# Altium PCB PCB1.PcbDoc (part 1 of 2)
Units mil, origin at the board's own origin, x right, y up, seen from the top; angles counter-clockwise.
Board outline 3380 x 2390 mil, 2 copper layers (Top Layer, Bottom Layer); 80 components, 56 nets, 292 pads, 26 vias.
Unrouted connection lines stored in the file: 2.
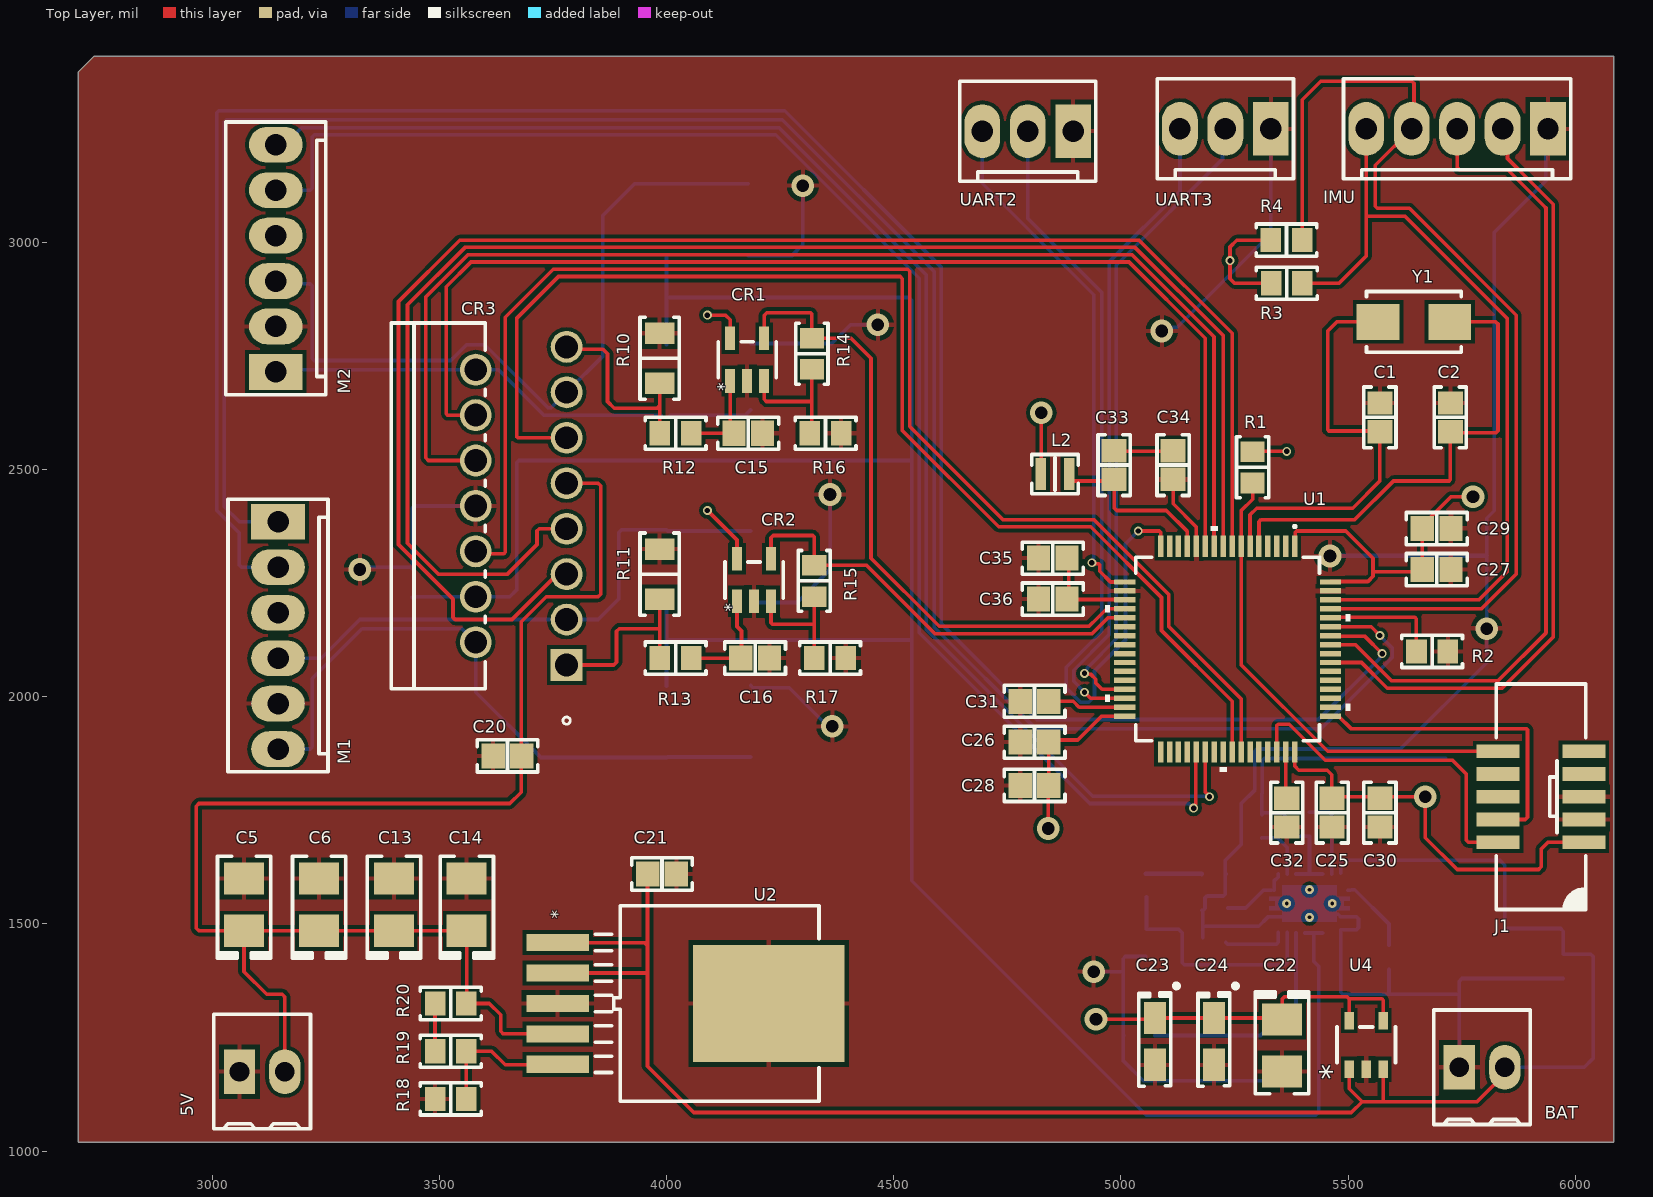
[diagram p0: Top Layer view]
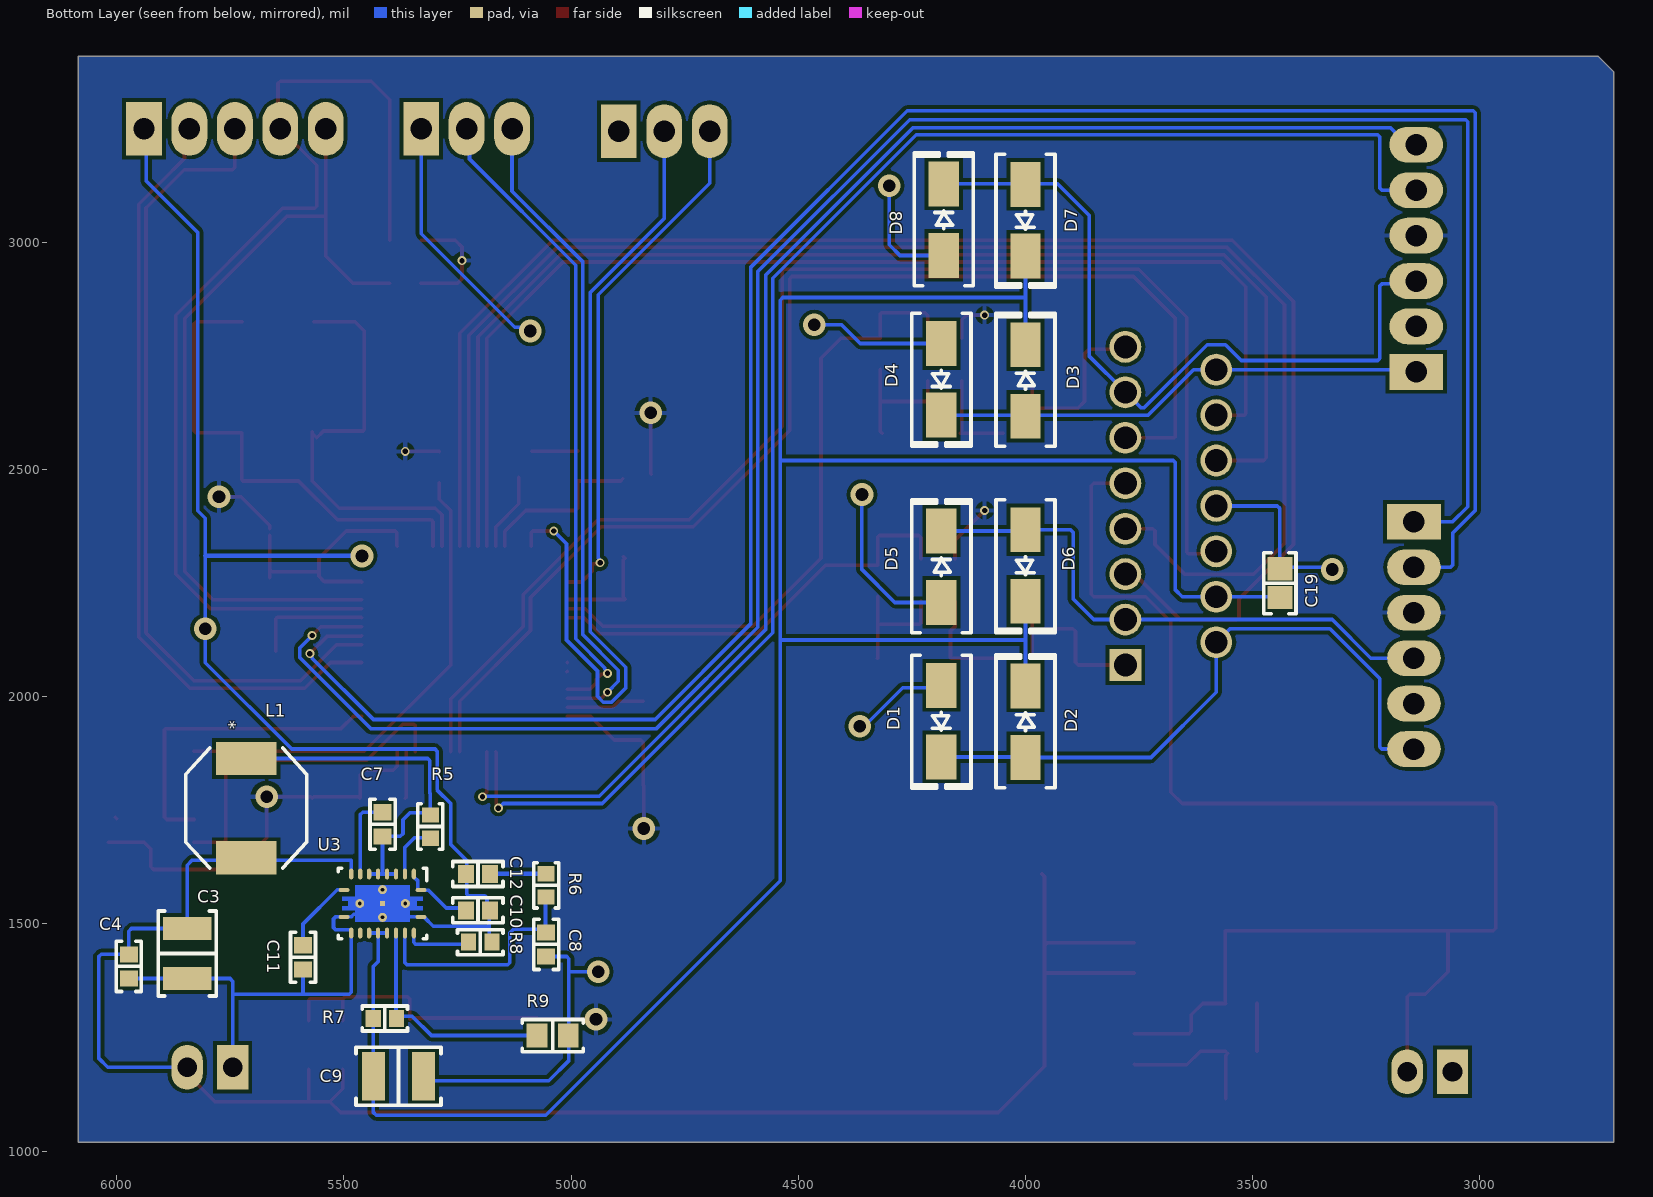
[diagram p1: Bottom Layer view, seen from below]
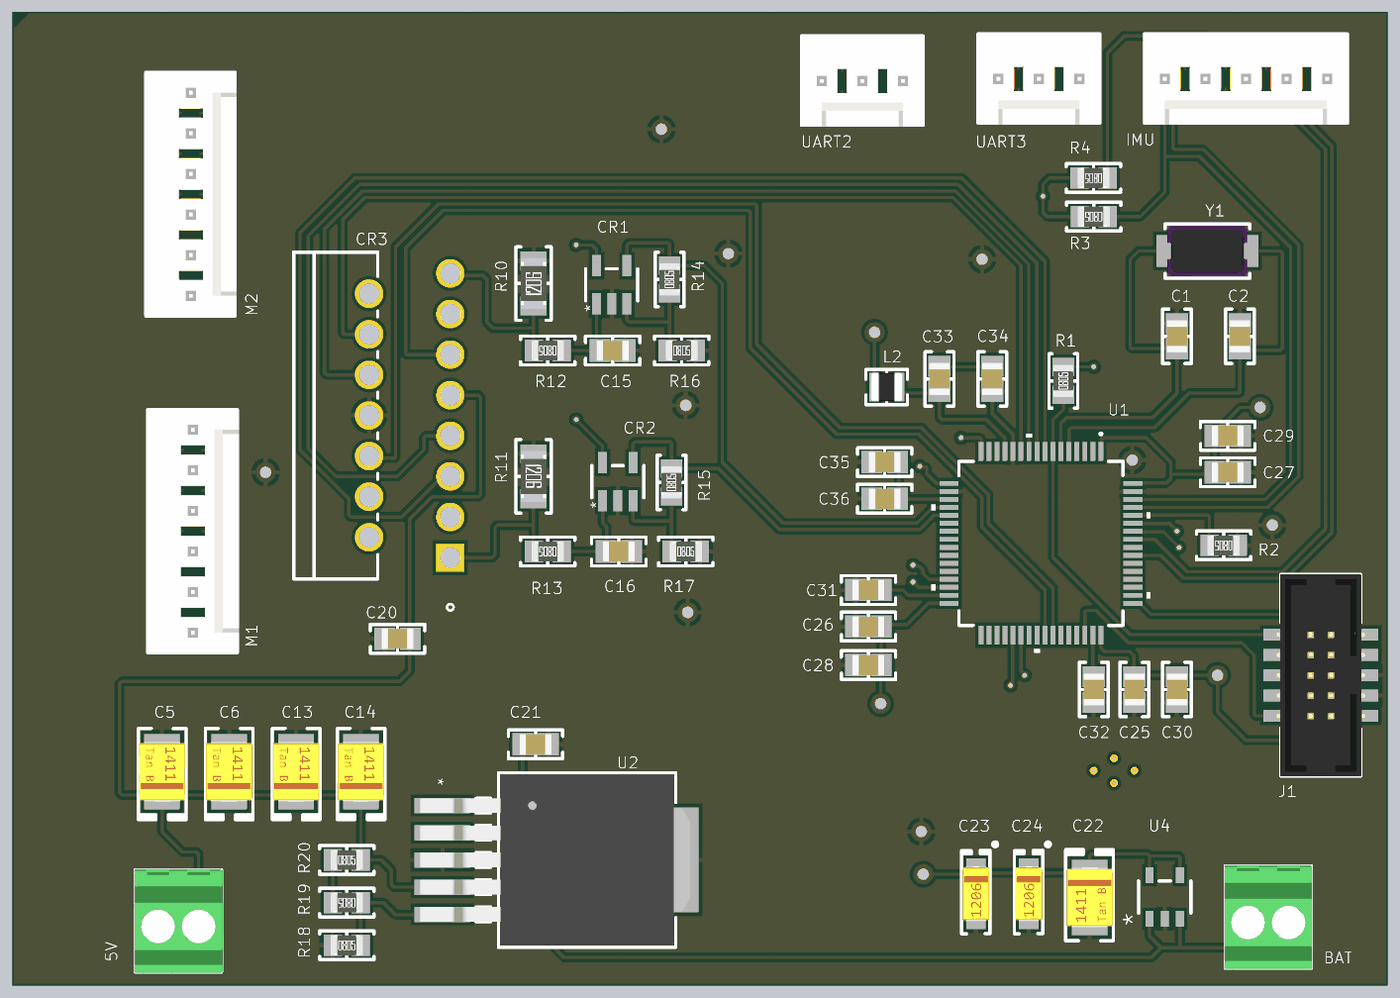
[diagram p2: 3D render of the assembled board from above, using the file's embedded part models]
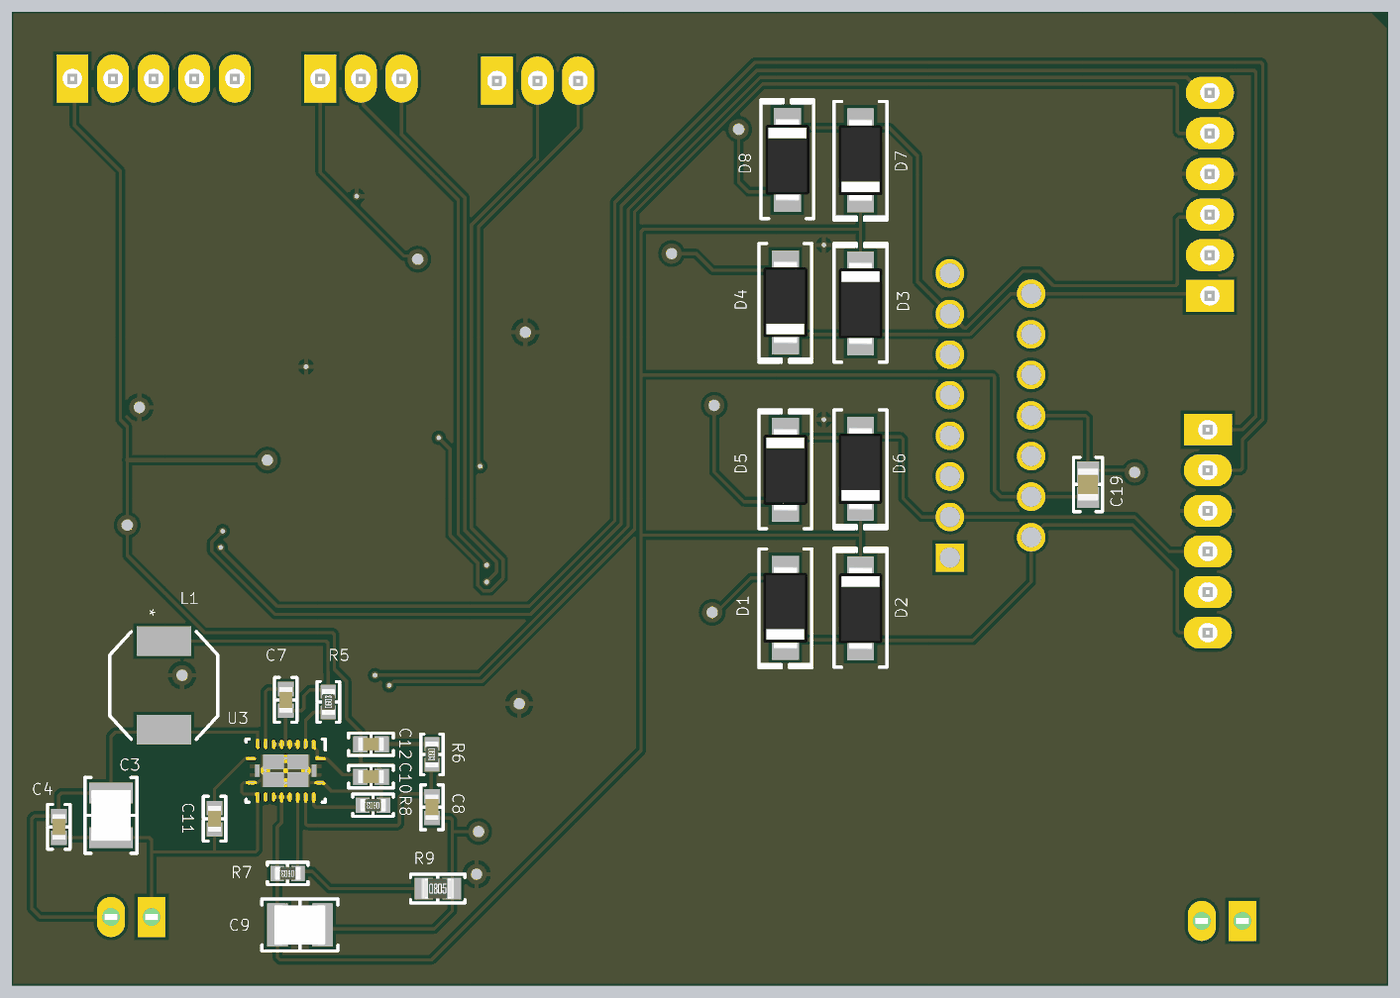
[diagram p3: 3D render of the assembled board from below, using the file's embedded part models]

## Layer stack, top to bottom
Top Solder: solder mask 1, SM-001, Dk 4
Top Layer: signal copper 1.4
Dielectric 1: dielectric 12.6, FR-4, Dk 4.8
Bottom Layer: signal copper 1.4
Bottom Solder: solder mask 1, SM-001, Dk 4

## Board outline
2705,1020 2705,3375 2740,3410 6085,3410 6085,1020

## Design rules (kind name [scope] priority, off if disabled: settings)
Clearance [All] p1: gap=8 ignorepadtopadclearanceinfootprint=TRUE except(0: Arc-Hole Track-Hole SMDPad-Hole THPad-Hole Via-Hole Fill-Hole Poly-Hole Region-Hole Text-Hole; 10: SMDPad-SMDPad)
PolygonConnect [All] p1: connectstyle=Relief reliefconductorwidth=10 reliefentries=4 polygonreliefangle="90 Angle" airgapwidth=10
RoutingVias [All] p1: holewidth=28 width=50 viastyle="Through Hole" minholewidth=28 minwidth=50 maxholewidth=28 maxwidth=50
SolderMaskExpansion [IsVia] p1: expansion=4 istentingtop=TRUE
UnRoutedNet [All] p1: checkbadconnections=TRUE
Width [All] p1: maxlimit=10 minlimit=4.92 preferedwidth=4.92 minimp=50.000000 maximp=50.000000 favimp=50.000000
29 further rules are at their usual default settings.

## Classes and differential pairs
component class Power_5v: C5 C6 C13 C14 C21 C25 C26 C27 C28 C29 C30 C31 C32 C33 C34 L2 R18 R19 R20 U4
component class Power_12v: C3 C4 C7 C8 C9 C10 C11 C12 L1 R5 R6 R7 R8 R9 U3
component class MotorControl: C15 C16 C20 CR1 CR2 D1 D2 D3 D4 D5 D6 D7 D8 M1 R10 R11 R12 R13 R14 R15 R16 R17
component class MCU: 5V BAT C1 C2 IMU J1 R1 R2 R3 R4 UART2

## Components (designator, comment, footprint, x,y, rotation, side; value= is the part's Value field where it differs from the comment)
5V "282834-2" "TE 282834-2" 3110,1175 r180 top (schematic designator J3)
BAT "282834-2" "TE 282834-2" 5795,1184.61 r180 top (schematic designator J2)
C1 "20pF" "CAP 0805_2012" 5570,2615 r270 top
C2 "20pF" "CAP 0805_2012" 5725,2615 r270 top
C3 "10µF" "CAP 1210_3225 - 2.8MM" 5845,1434.88 r270 bottom
C4 "22pF" "CAP 0603_1608" 5973.44,1406.57 r270 bottom
C5 "47µF" "CAP POL 1411_3528" 3070,1542.48 r90 top
C6 "47µF" "CAP POL 1411_3528" 3235,1542.48 r90 top
C7 "0.1µF" "CAP 0603_1608" 5415,1719.39 r270 bottom
C8 "22pF" "CAP 0603_1608" 5055,1455 r90 bottom value=30pF
C9 "22µF" "CAP 1210_3225 - 2.8MM" 5380,1165 r0 bottom
C10 "1µF" "CAP 0603_1608" 5205,1530 r0 bottom
C11 "1µF" "CAP 0603_1608" 5590,1426.57 r90 bottom value=8200pF
C12 "470pF" "CAP 0603_1608" 5205,1610 r180 bottom value=680pF
C13 "47µF" "CAP POL 1411_3528" 3400,1542.48 r90 top
C14 "47µF" "CAP POL 1411_3528" 3560,1542.48 r90 top
C15 "0.1µF" "CAP 0805_2012" 4180,2580 r0 top
C16 "0.1µF" "CAP 0805_2012" 4195,2085 r180 top
C19 "0.1µF" "CAP 0805_2012" 3440,2250 r270 bottom
C20 "0.1µF" "CAP 0805_2012" 3650,1870 r0 top
C21 "10µF" "CAP 0805_2012" 3990,1610 r180 top
C22 "22µF" "CAP POL 1411_3528" 5355,1232.48 r270 top
C23 "2.2µF" "CAP POL 1206_3216" 5075,1241.57 r270 top
C24 "2.2µF" "CAP POL 1206_3216" 5205,1241.57 r270 top
C25 "0.1µF" "CAP 0805_2012" 5465,1745 r90 top
C26 "0.1µF" "CAP 0805_2012" 4810,1900 r0 top
C27 "0.1µF" "CAP 0805_2012" 5695,2280 r180 top
C28 "0.1µF" "CAP 0805_2012" 4810,1805 r0 top
C29 "0.1µF" "CAP 0805_2012" 5695,2370 r180 top
C30 "0.1µF" "CAP 0805_2012" 5570,1745 r90 top
C31 "2.2µF" "CAP 0805_2012" 4810,1990 r0 top
C32 "2.2µF" "CAP 0805_2012" 5365,1745 r90 top
C33 "47µF" "CAP 0805_2012" 4985,2510 r270 top
C34 "47µF" "CAP 0805_2012" 5115,2510 r90 top
C35 "0.1µF" "CAP 0805_2012" 4850,2215 r0 top
C36 "0.1µF" "CAP 0805_2012" 4850,2305 r0 top
CR1 "LMV321ILT" SOT23-5_STM 4177.6,2742 r90 top
CR2 "LMV321ILT" SOT23-5_STM 4192.6,2257 r90 top
CR3 "L298N" Multiwatt15_V_STM 3780,2070 r90 top
D1 "US1G R3G" "DO214AC SMA" 4185,1946.26 r270 bottom
D2 "US1G R3G" "DO214AC SMA" 4000,1945 r90 bottom
D3 "US1G R3G" "DO214AC SMA" 4000,2696.26 r90 bottom
D4 "US1G R3G" "DO214AC SMA" 4185,2698.74 r270 bottom
D5 "US1G R3G" "DO214AC SMA" 4185,2286.26 r90 bottom
D6 "US1G R3G" "DO214AC SMA" 4000,2288.74 r270 bottom
D7 "US1G R3G" "DO214AC SMA" 4000,3048.74 r270 bottom
D8 "US1G R3G" "DO214AC SMA" 4180,3050 r90 bottom
IMU "0022272051" "MOLEX KK 0022272051" 5740,3250 r0 top (schematic designator J5)
J1 "3221-10-0300-00" "CNC TECH 3221-10-0300-00" 5924.49,1780 r180 top
L1 "SPM6530T-2R2M" IND_SPM6530_TDK 5715,1755 r270 bottom
L2 "3.3µH" "IND 0806_2016" 4855,2490 r0 top
M1 "0022272061" "MOLEX KK 0022272061"#1 3145,2135 r90 top (schematic designator J7)
M2 "0022272061" "MOLEX KK 0022272061"#2 3140,2965 r90 top (schematic designator J8)
R1 "10 kOhms" "RES 0805_2012" 5290,2505 r90 top
R2 "10 kOhms" "RES 0805_2012" 5685,2100 r180 top
R3 "4.7 kOhms" "RES 0805_2012" 5365,2910 r180 top
R4 "4.7 kOhms" "RES 0805_2012" 5364.45,3005 r180 top
R5 "267 kOhms" "RES 0603_1608" 5310,1714.39 r90 bottom value="365 kOhms"
R6 "36.5 kOhms" "RES 0603_1608" 5055,1585 r270 bottom value="44.2 kOhms"
R7 "267 kOhms" "RES 0603_1608" 5410,1291.93 r0 bottom value="825 Ohms"
R8 "105 kOhms" "RES 0603_1608" 5200,1460 r0 bottom
R9 "392 kOhms" "RES 0805_2012" 5040.55,1254.39 r180 bottom value="91 kOhms"
R10 "10 mOhms" "RES 1206_3216" 3985,2745 r90 top
R11 "10 mOhms" "RES 1206_3216" 3985,2270 r270 top
R12 "1 kOhms" "RES 0805_2012" 4020,2580 r180 top
R13 "1 kOhms" "RES 0805_2012" 4020,2085 r180 top
R14 "5.6 kOhms" "RES 0805_2012" 4320,2755 r90 top
R15 "5.6 kOhms" "RES 0805_2012" 4325,2255 r90 top
R16 "1 kOhms" "RES 0805_2012" 4350,2580 r0 top
R17 "1 kOhms" "RES 0805_2012" 4360,2085 r0 top
R18 "10 kOhms" "RES 0805_2012" 3525,1115 r0 top
R19 "2 kOhms" "RES 0805_2012" 3525,1220 r180 top
R20 "30 kOhms" "RES 0805_2012" 3525,1325 r0 top
U1 "STM32F405RGT6" LQFP64-10x10mm 5235,2105 r270 top
U2 "MIC29302WU-TR" TO-263-5_MCH 4117,1325 r270 top
U3 "TPS61088RHLR" RHL0020A 5415,1545 r270 bottom value=Value
U4 "MIC5219-3.3YM5-TR" SOT-23-5_M5_MCH 5540,1233.75 r90 top
UART2 "0022272031" "MOLEX KK 0022272031" 4795,3245 r0 top (schematic designator J4)
UART3 "0022272031" "MOLEX KK 0022272031" 5230,3250 r0 top (schematic designator J6)
Y1 "8MHz" "NDK NX5032GA" 5645,2825 r0 top

## Footprints (in the part's own frame and the unit in brackets; to place one, negate y for a bottom-side part, rotate by r counter-clockwise, add the part's x,y. Pads: shape width x height; smd on the part's side, far side on the other; paste and mask are expansions set on the pad)
"CAP 0603_1608" [mm] "Chip Capacitor, 2-Leads, Body 1.60x0.80mm, IPC Medium Density"
  rect 0.9x1 smd: 1(-0.675,0) 2(0.675,0)
  silkscreen extent -1.4,-0.7 1.4,0.7, body extent -0.8,-0.41 0.8,0.41, height 0.82
"CAP 0805_2012" [mm] "Chip Capacitor, 2-Leads, Body 2.00x1.20mm, IPC Medium Density"
  rect 1.3x1.4 smd: 1(-0.8,0) 2(0.8,0)
  silkscreen extent -1.7,-0.9 1.7,0.9, body extent -1,-0.64 1,0.64, height 1.26
"CAP 1210_3225 - 2.8MM" [mm] "Chip Capacitor, 2-Leads, Body 3.20x2.50mm, IPC Medium Density"
  rect 1.3x2.7 smd: 1(-1.4,0) 2(1.4,0)
  silkscreen extent -2.37,-1.63 2.37,1.63, body extent -1.6,-1.25 1.6,1.25, height 2.8
"CAP POL 1206_3216" [mm] "Molded Capacitor, 2-Leads, Body 3.20x1.6mm, IPC Medium Density"
  rect 1.8x1.23 smd: 1(-1.31,0) 2(1.31,0)
  silkscreen extent -3.22,-0.9 2.5,1.33, body extent -1.72,-0.85 1.71,0.85, height 1.7
"CAP POL 1411_3528" [mm] "Molded Capacitor, 2-Leads, Body 3.50x2.80mm, IPC Medium Density"
  rect 1.8x2.23 smd: 1(-1.46,0) 2(1.46,0)
  silkscreen extent -3,-1.5 2.71,1.48, body extent -1.87,-1.45 1.86,1.45, height 2
"CNC TECH 3221-10-0300-00" [mm]
  rect 2.4x0.76 smd: 1(-2.4,2.54) 2(-2.4,1.27) 3(-2.4,0) 4(-2.4,-1.27) 5(-2.4,-2.54) 6(2.4,-2.54) 7(2.4,-1.27) 8(2.4,0) 9(2.4,1.27) 10(2.4,2.54)
  silkscreen extent -2.5,-6.3 2.5,6.3, body extent -2.75,-6.32 2.75,6.33, height 5.6
"DO214AC SMA" [mm] "Molded Diode, 2-Leads, Body 4.30x2.60mm, IPC Medium Density"
  rect 2.5x1.7 smd: 1(-2,0) 2(2,0)
  silkscreen extent -3.68,-1.65 3.75,1.65, body extent -2.6,-1.37 2.6,1.37, height 2.4
"IND 0806_2016" [mm] "Chip Capacitor, 2-Leads, Body 2.00x1.20mm, IPC Medium Density"
  rect 0.6x1.8 smd: 1(-0.8,0) 2(0.8,0)
  silkscreen extent -1.3,-1.1 1.3,1.1, body extent -1.01,-0.91 1.01,0.91, height 1.81
IND_SPM6530_TDK [mm]
  rect 1.85x3.4 smd paste+0 mask+0: 1(-2.775,0) 2(2.775,0)
  silkscreen extent -3.37,-3.38 3.37,3.38, body extent 0,0 0.25,0.25, height 0.25
LQFP64-10x10mm [mil]
  rect 47x12 smd paste+0 mask+0: 1(-226.38,147.64) 2(-226.38,127.95) 3(-226.38,108.27) 4(-226.38,88.58) 5(-226.38,68.9) 6(-226.38,49.21) 7(-226.38,29.53) 8(-226.38,9.84) 9(-226.38,-9.84) 10(-226.38,-29.53) 11(-226.38,-49.21) 12(-226.38,-68.9) 13(-226.38,-88.58) 14(-226.38,-108.27) 15(-226.38,-127.95) 16(-226.38,-147.64) 33(226.38,-147.64) 34(226.38,-127.95) 35(226.38,-108.27) 36(226.38,-88.58) 37(226.38,-68.9) 38(226.38,-49.21) 39(226.38,-29.53) 40(226.38,-9.84) 41(226.38,9.84) 42(226.38,29.53) 43(226.38,49.21) 44(226.38,68.9) 45(226.38,88.58) 46(226.38,108.27) 47(226.38,127.95) 48(226.38,147.64)
  rect 12x47 smd paste+0 mask+0: 17(-147.64,-226.38) 18(-127.95,-226.38) 19(-108.27,-226.38) 20(-88.58,-226.38) 21(-68.9,-226.38) 22(-49.21,-226.38) 23(-29.53,-226.38) 24(-9.84,-226.38) 25(9.84,-226.38) 26(29.53,-226.38) 27(49.21,-226.38) 28(68.9,-226.38) 29(88.58,-226.38) 30(108.27,-226.38) 31(127.95,-226.38) 32(147.64,-226.38) 49(147.64,226.38) 50(127.95,226.38) 51(108.27,226.38) 52(88.58,226.38) 53(68.9,226.38) 54(49.21,226.38) 55(29.53,226.38) 56(9.84,226.38) 57(-9.84,226.38) 58(-29.53,226.38) 59(-49.21,226.38) 60(-68.9,226.38) 61(-88.58,226.38) 62(-108.27,226.38) 63(-127.95,226.38) 64(-147.64,226.38)
  silkscreen extent -273,-270 270,270, body extent 0,0 10,10, height 10
"MOLEX KK 0022272031" [mm]
  oval 2x3 hole 1.2: 1(-2.54,0) 2(0,0)
  rect 2x3 hole 1.2: 3(2.54,0)
  silkscreen extent -3.81,-2.79 3.81,2.79, body extent -3.81,-2.9 3.81,2.9, height 11.7
"MOLEX KK 0022272051" [mm]
  oval 2x3 hole 1.2: 1(-5.08,0) 2(-2.54,0) 3(0,0) 4(2.54,0)
  rect 2x3 hole 1.2: 5(5.08,0)
  silkscreen extent -6.35,-2.79 6.35,2.79, body extent -6.35,-2.9 6.35,2.9, height 11.7
"MOLEX KK 0022272061"#1 [mm]
  oval 2x3 hole 1.2: 1(-6.35,0) 2(-3.81,0) 3(-1.27,0) 4(1.27,0) 5(3.81,0)
  rect 2x3 hole 1.2: 6(6.35,0)
  silkscreen extent -7.62,-2.79 7.62,2.79, body extent -7.62,-2.9 7.62,2.9, height 11.7
"MOLEX KK 0022272061"#2 [mm]
  rect 2x3 hole 1.2: 1(-6.35,0)
  oval 2x3 hole 1.2: 2(-3.81,0) 3(-1.27,0) 4(1.27,0) 5(3.81,0) 6(6.35,0)
  silkscreen extent -7.62,-2.79 7.62,2.79, body extent -7.62,-2.9 7.62,2.9, height 11.7
Multiwatt15_V_STM [mil]
  rect 70x70 hole 50 mask+0: 1(0,0)
  round 70 hole 50 mask+0: 2(50,200) 3(100,0) 4(150,200) 5(200,0) 6(250,200) 7(300,0) 8(350,200) 9(400,0) 10(450,200) 11(500,0) 12(550,200) 13(600,0) 14(650,200) 15(700,0)
  silkscreen extent -130,-8 752,386, body extent 0,0 10,10, height 10
"NDK NX5032GA" [mm] "Crystal, 2-Leads, Body 5.00x3.20mm, IPC Medium Density"
  rect 2.4x2 smd: 1(-2,0) 2(2,0)
  silkscreen extent -2.65,-1.7 2.65,1.7, body extent -2.5,-1.6 2.5,1.6, height 1.2
"RES 0603_1608" [mm] "Chip Resistor, 2-Leads, Body 1.60x0.80mm, IPC Medium Density"
  rect 0.85x0.95 smd: 1(-0.65,0) 2(0.65,0)
  silkscreen extent -1.27,-0.7 1.27,0.7, body extent -0.8,-0.4 0.8,0.4, height 0.45
"RES 0805_2012" [mm] "Chip Resistor, 2-Leads, Body 2.00x1.25mm, IPC Medium Density"
  rect 1.15x1.35 smd: 1(-0.875,0) 2(0.875,0)
  silkscreen extent -1.7,-0.9 1.7,0.9, body extent -1,-0.62 1,0.63, height 0.6
"RES 1206_3216" [mm] "Chip Resistor, 2-Leads, Body 3.13x1.55mm, IPC Medium Density"
  rect 1.2x1.65 smd: 1(-1.4,0) 2(1.4,0)
  silkscreen extent -2.3,-1.1 2.3,1.1, body extent -1.6,-0.8 1.6,0.8, height 0.6
RHL0020A [mm]
  oval 0.24x0.6 smd paste-0.102 mask+0.051: 1(-0.75,2.15) 10(-0.75,-2.15) 11(0.75,-2.15) 20(0.75,2.15)
  oval 0.6x0.24 smd paste-0.102 mask+0.051: 2(-1.65,1.75) 3(-1.65,1.25) 4(-1.65,0.75) 5(-1.65,0.25) 6(-1.65,-0.25) 7(-1.65,-0.75) 8(-1.65,-1.25) 9(-1.65,-1.75) 12(1.65,-1.75) 13(1.65,-1.25) 14(1.65,-0.75) 15(1.65,-0.25) 16(1.65,0.25) 17(1.65,0.75) 18(1.65,1.25) 19(1.65,1.75)
  rect 0.3x0.3 smd paste-0.137 mask+0: 21(0,0)
  round 0.5 hole 0.203 mask+0.051: V(-0.775,0) V(0,-1.275) V(0,1.275) V(0.775,0)
  Top Layer region: 0.39,2.25 0.16,2.25 0.16,1.925 -0.16,1.925 -0.16,2.25 -0.39,2.25 -0.39,1.525 -1.025,1.525 -1.025,-1.525 -0.39,-1.525 -0.39,-2.25 -0.16,-2.25 -0.16,-1.925 0.16,-1.925 0.16,-2.25 0.39,-2.25 0.39,-1.525 1.025,-1.525 1.025,1.525 0.39,1.525
  silkscreen extent -1.98,-2.47 1.98,2.47, body extent 0,0 0.25,0.25, height 0.25
SOT23-5_STM [mil]
  rect 52x22 smd paste+0 mask+0: 1(-47,37.4) 2(-47,0) 3(-47,-37.4) 4(47,-37.4) 5(47,37.4)
  silkscreen extent -40,-64 40,64, body extent 0,0 10,10, height 10
SOT-23-5_M5_MCH [mil]
  rect 38.5x20 smd paste+0 mask+0: 1(-53.75,37.4) 2(-53.75,0) 3(-53.75,-37.4) 4(53.75,-37.4) 5(53.75,37.4)
  silkscreen extent -40,-64 40,64, body extent 0,0 10,10, height 10
"TE 282834-2" [mm]
  oval 1.75x2.5 hole 1.1: 1(-1.27,0)
  rect 1.75x2.5 hole 1.1: 2(1.27,0)
  silkscreen extent -2.7,-3.2 2.7,3.2, body extent -2.77,-3.25 2.77,3.25, height 10
TO-263-5_MCH [mil]
  rect 38x138 smd paste+0 mask+0: 1(-134,-356.5) 2(-67,-356.5) 3(0,-356.5) 4(67,-356.5) 5(134,-356.5)
  rect 258x333 smd paste+0 mask+0: 6(0,108)
  silkscreen extent -215,-274 215,219, body extent -210,-411 210,254, height 181

## Part data
5V BAT: "TERM BLK 2P SIDE ENT 2.54MM PCB", Color=Green, Current=10A, Manufacturer="TE Connectivity AMP Connectors", Supplier Part Number 1=A98333-ND, Voltage=150V, ComponentLink1Description=Datasheet, ComponentLink1URL=https://www.te.com/commerce/DocumentDelivery/DDEController?Action=srchrtrv&DocNm=282834&DocType=Customer+Drawing&DocLang=English, ComponentLink2Description="DigiKey Link", ComponentLink2URL=http://digikey.com/product-detail/en/te-connectivity-amp-connectors/282834-2/A98333-ND/1150135, LastUpdated="1/15/2020 4:15:38 AM", Lifecycle Status=Active, Mating Orientation="Horizontal with Board", Minimum Order=1, Mounting Type="Through Hole", Number of Levels=1, Packaging=Bulk, Part Number=282834-2, Part Status=Active, Pitch="0.100\" (2.54mm)", Positions Per Level=2, Price=0.88, Series=Buchanan, Supplier 1=DigiKey, Wire Gauge="16-30 AWG", Wire Termination="Screw - Rising Cage Clamp"
C1 C2: library part C0805C200J4GAC7800, "CAP CER 20PF 16V C0G/NP0 0805", Device Package="0805 (2012 Metric)", Manufacturer=KEMET, Operating Temperature="-55°C ~ 125°C", Supplier Part Number 1=399-9987-1-ND, Temperature Coefficient="C0G, NP0", Tolerance=±5%, Voltage - Rated=16V, Applications="General Purpose", Capacitance=20pF, ComponentLink1Description=Datasheet, ComponentLink1URL=https://api.kemet.com/component-edge/download/datasheet/C0805C200J4GAC7800.pdf, ComponentLink2Description="DigiKey Link", ComponentLink2URL=http://digikey.com/product-detail/en/kemet/C0805C200J4GAC7800/399-9987-1-ND/3736986, Features="Low ESL", LastUpdated="9/2/2020 1:04:36 AM", Lifecycle Status=Active, Minimum Order=1, Mounting Type="Surface Mount, MLCC", Package / Case="0805 (2012 Metric)", Packaging=TapeAndReel, Part Number=C0805C200J4GAC7800, Part Status=Active, PartId=5865, Price=0.06, Series="SMD Comm C0G", Size / Dimension="0.079\" L x 0.049\" W (2.00mm x 1.25mm)", Supplier 1=DigiKey, Thickness (Max)="0.035\" (0.88mm)"
C3: library part GCJ32EC71H106KA01L, "CAP CER 10UF 50V X7S 1210", Device Package="1210 (3225 Metric)", Manufacturer="Murata Electronics", Operating Temperature="-55°C ~ 125°C", Ratings=AEC-Q200, Supplier Part Number 1=490-14418-1-ND, Temperature Coefficient=X7S, Tolerance=±10%, Voltage - Rated=50V, Applications="Automotive, Boardflex Sensitive", Capacitance=10µF, ComponentLink1Description=Datasheet, ComponentLink1URL=https://search.murata.co.jp/Ceramy/image/img/A01X/G101/ENG/GCJ32EC71H106KA01-01.pdf, ComponentLink2Description="DigiKey Link", ComponentLink2URL=http://digikey.com/product-detail/en/murata-electronics/GCJ32EC71H106KA01L/490-14418-1-ND/6606879, Features="Soft Termination", LastUpdated="9/2/2020 1:10:53 AM", Lifecycle Status=Active, Minimum Order=1, Mounting Type="Surface Mount, MLCC", Package / Case="1210 (3225 Metric)", Packaging=TapeAndReel, Part Number=GCJ32EC71H106KA01L, Part Status=Active, PartId=23622, Price=0.53, Series=GCJ, Size / Dimension="0.126\" L x 0.098\" W (3.20mm x 2.50mm)", Supplier 1=DigiKey, Thickness (Max)="0.110\" (2.80mm)"
C4: library part 06033A220KAT2A, "CAP CER 22PF 25V C0G/NP0 0603", Device Package="0603 (1608 Metric)", Manufacturer="AVX Corporation", Operating Temperature="-55°C ~ 125°C", Supplier Part Number 1=478-11803-1-ND, Temperature Coefficient="C0G, NP0", Tolerance=±10%, Voltage - Rated=25V, Applications="General Purpose", Capacitance=22pF, ComponentLink1Description=Datasheet, ComponentLink1URL=http://datasheets.avx.com/C0GNP0-Dielectric.pdf, ComponentLink2Description="DigiKey Link", ComponentLink2URL=http://digikey.com/product-detail/en/avx-corporation/06033A220KAT2A/478-11803-1-ND/8573439, LastUpdated="9/2/2020 1:03:34 AM", Lifecycle Status=Active, Minimum Order=1, Mounting Type="Surface Mount, MLCC", Package / Case="0603 (1608 Metric)", Packaging=TapeAndReel, Part Number=06033A220KAT2A, Part Status=Active, PartId=3017, Price=0.04, Series=-, Size / Dimension="0.063\" L x 0.032\" W (1.60mm x 0.81mm)", Supplier 1=DigiKey, Thickness (Max)="0.035\" (0.90mm)"
C5 C6 C13 C14: library part TPSB476K010R0250, "CAP TANT 47UF 10% 10V 1411", ESR (Equivalent Series Resistance)=250mOhm, Manufacturer="AVX Corporation", Manufacturer Size Code=B, Operating Temperature="-55°C ~ 125°C", Package / Case="1411 (3528 Metric), 1210", Supplier Part Number 1=478-3085-1-ND, Tolerance=±10%, Voltage - Rated=10V, Capacitance=47µF, ComponentLink1Description=Datasheet, ComponentLink1URL=http://datasheets.avx.com/TPS.pdf, ComponentLink2Description="DigiKey Link", ComponentLink2URL=http://digikey.com/product-detail/en/avx-corporation/TPSB476K010R0250/478-3085-1-ND/809598, Features="General Purpose", Height - Seated (Max)="0.083\" (2.10mm)", LastUpdated="02.09.2020 1:15:46", Lifecycle Status=Active, Minimum Order=1, Mounting Type="Surface Mount", Packaging=TapeAndReel, Part Number=TPSB476K010R0250, Part Status=Active, PartId=66, Price=0.18, Series=TPS, Size / Dimension="0.138\" L x 0.110\" W (3.50mm x 2.80mm)", Supplier 1=DigiKey, Type=Molded
C7: library part 0603YC104JAT4A, "CAP CER 0.1UF 16V X7R 0603", Device Package="0603 (1608 Metric)", Manufacturer="AVX Corporation", Operating Temperature="-55°C ~ 125°C", Supplier Part Number 1=478-7621-1-ND, Temperature Coefficient=X7R, Tolerance=±5%, Voltage - Rated=16V, Applications="General Purpose", Capacitance=0.1µF, ComponentLink1Description=Datasheet, ComponentLink1URL=http://datasheets.avx.com/X7RDielectric.pdf, ComponentLink2Description="DigiKey Link", ComponentLink2URL=http://digikey.com/product-detail/en/avx-corporation/0603YC104JAT4A/478-7621-1-ND/7536239, LastUpdated="9/2/2020 1:03:19 AM", Lifecycle Status=Active, Minimum Order=1, Mounting Type="Surface Mount, MLCC", Package / Case="0603 (1608 Metric)", Packaging=TapeAndReel, Part Number=0603YC104JAT4A, Part Status=Active, PartId=11638, Price=0.03, Series=-, Size / Dimension="0.063\" L x 0.032\" W (1.60mm x 0.81mm)", Supplier 1=DigiKey, Thickness (Max)="0.035\" (0.90mm)"
C8: library part C0805C300J5GACTU, "CAP CER 30PF 50V C0G/NP0 0805", Capacitance=30pF, Device Package="0805 (2012 Metric)", Manufacturer=KEMET, Operating Temperature="-55°C ~ 125°C", Supplier Part Number 1=399-9219-1-ND, Temperature Coefficient="C0G, NP0", Tolerance=±5%, Voltage - Rated=50V, Applications="General Purpose", ComponentLink1Description=Datasheet, ComponentLink1URL=https://api.kemet.com/component-edge/download/datasheet/C0805C300J5GACTU.pdf, ComponentLink2Description="DigiKey Link", ComponentLink2URL=http://digikey.com/product-detail/en/kemet/C0805C300J5GACTU/399-9219-1-ND/3522737, Features="Low ESL", LastUpdated="9/2/2020 1:04:20 AM", Lifecycle Status=Active, Minimum Order=1, Mounting Type="Surface Mount, MLCC", Package / Case="0805 (2012 Metric)", Packaging=TapeAndReel, Part Number=C0805C300J5GACTU, Part Status=Active, PartId=14047, Price=0.06, Series="SMD Comm C0G", Size / Dimension="0.079\" L x 0.049\" W (2.00mm x 1.25mm)", Supplier 1=DigiKey, Thickness (Max)="0.035\" (0.88mm)"
C9: library part GRM32ER71E226ME15K, "CAP CER 22UF 25V X7R 1210", Device Package="1210 (3225 Metric)", Manufacturer="Murata Electronics", Operating Temperature="-55°C ~ 125°C", Supplier Part Number 1=490-14682-1-ND, Temperature Coefficient=X7R, Tolerance=±20%, Voltage - Rated=25V, Applications="General Purpose", Capacitance=22µF, ComponentLink1Description=Datasheet, ComponentLink1URL=https://search.murata.co.jp/Ceramy/image/img/A01X/G101/ENG/GRM32ER71E226ME15-01.pdf, ComponentLink2Description="DigiKey Link", ComponentLink2URL=http://digikey.com/product-detail/en/murata-electronics/GRM32ER71E226ME15K/490-14682-1-ND/6606288, LastUpdated="9/2/2020 1:10:50 AM", Lifecycle Status=Active, Minimum Order=1, Mounting Type="Surface Mount, MLCC", Package / Case="1210 (3225 Metric)", Packaging=TapeAndReel, Part Number=GRM32ER71E226ME15K, Part Status=Active, PartId=24019, Price=0.35, Series=GRM, Size / Dimension="0.126\" L x 0.098\" W (3.20mm x 2.50mm)", Supplier 1=DigiKey, Thickness (Max)="0.106\" (2.70mm)"
C10: library part C0603C105K4PACTU, "CAP CER 1UF 16V X5R 0603", Device Package="0603 (1608 Metric)", Manufacturer=KEMET, Operating Temperature="-55°C ~ 85°C", Supplier Part Number 1=399-5090-1-ND, Temperature Coefficient=X5R, Tolerance=±10%, Voltage - Rated=16V, Applications="General Purpose", Capacitance=1µF, ComponentLink1Description=Datasheet, ComponentLink1URL=https://api.kemet.com/component-edge/download/datasheet/C0603C105K4PACTU.pdf, ComponentLink2Description="DigiKey Link", ComponentLink2URL=http://digikey.com/product-detail/en/kemet/C0603C105K4PACTU/399-5090-1-ND/1465624, LastUpdated="9/2/2020 1:03:33 AM", Lifecycle Status=Active, Minimum Order=1, Mounting Type="Surface Mount, MLCC", Package / Case="0603 (1608 Metric)", Packaging=TapeAndReel, Part Number=C0603C105K4PACTU, Part Status=Active, PartId=3768, Price=0.02, Series="SMD Comm X5R", Size / Dimension="0.063\" L x 0.031\" W (1.60mm x 0.80mm)", Supplier 1=DigiKey, Thickness (Max)="0.035\" (0.90mm)"
C11: library part CDR31BX822AKUS7185, "CAP CER 8200PF 50V BX 0805", Capacitance=8200pF, Device Package="0805 (2012 Metric)", Manufacturer=KEMET, Operating Temperature="-55°C ~ 125°C", Supplier Part Number 1=1001-2399-1-ND, Temperature Coefficient=BX, Tolerance=±10%, Voltage - Rated=50V, Applications="High Reliability", ComponentLink1Description=Datasheet, ComponentLink1URL=https://content.kemet.com/datasheets/F3102_MIL-PRF-55681.pdf, ComponentLink2Description="DigiKey Link", ComponentLink2URL=http://digikey.com/product-detail/en/kemet/CDR31BX822AKUS7185/1001-2399-1-ND/3738615, Failure Rate="S (0.001%)", LastUpdated="9/2/2020 1:04:33 AM", Lifecycle Status=Active, Minimum Order=1, Mounting Type="Surface Mount, MLCC", Package / Case="0805 (2012 Metric)", Packaging=TapeAndReel, Part Number=CDR31BX822AKUS7185, Part Status=Active, PartId=7255, Price=0.86, Series="Military, MIL-PRF-55681, CDR31", Size / Dimension="0.079\" L x 0.049\" W (2.00mm x 1.25mm)", Supplier 1=DigiKey, Thickness (Max)="0.051\" (1.30mm)"
C12: library part CC0805JRNPO9BN681, "CAP CER 680PF 50V C0G/NPO 0805", Capacitance=680pF, Device Package="0805 (2012 Metric)", Manufacturer=Yageo, Operating Temperature="-55°C ~ 125°C", Supplier Part Number 1=311-1121-1-ND, Temperature Coefficient="C0G, NP0", Tolerance=±5%, Voltage - Rated=50V, Applications="General Purpose", ComponentLink1Description=Datasheet, ComponentLink1URL=https://www.yageo.com/upload/media/product/productsearch/datasheet/mlcc/UPY-GP_NP0_16V-to-50V_17.pdf, ComponentLink2Description="DigiKey Link", ComponentLink2URL=http://digikey.com/product-detail/en/yageo/CC0805JRNPO9BN681/311-1121-1-ND/303031, Features="High Voltage", LastUpdated="9/2/2020 1:04:42 AM", Lifecycle Status=Active, Minimum Order=1, Mounting Type="Surface Mount, MLCC", Package / Case="0805 (2012 Metric)", Packaging=TapeAndReel, Part Number=CC0805JRNPO9BN681, Part Status=Active, PartId=2491, Price=0.02, Series=CC, Size / Dimension="0.079\" L x 0.049\" W (2.00mm x 1.25mm)", Supplier 1=DigiKey, Thickness (Max)="0.024\" (0.60mm)"
C15 C16: library part VJ0805V104ZXJCW1BC, "CAP CER 0.1UF 16V Y5V 0805", Device Package="0805 (2012 Metric)", Manufacturer="Vishay Vitramon", Operating Temperature="-25°C ~ 85°C", Supplier Part Number 1=720-1731-1-ND, Temperature Coefficient="Y5V (F)", Tolerance="-20%, +80%", Voltage - Rated=16V, Applications="General Purpose", Capacitance=0.1µF, ComponentLink1Description=Datasheet, ComponentLink1URL=https://www.vishay.com/docs/28548/vjw1bcbascomseries.pdf, ComponentLink2Description="DigiKey Link", ComponentLink2URL=http://digikey.com/product-detail/en/vishay-vitramon/VJ0805V104ZXJCW1BC/720-1731-1-ND/8324151, LastUpdated="9/2/2020 1:04:40 AM", Lifecycle Status=Active, Minimum Order=1, Mounting Type="Surface Mount, MLCC", Package / Case="0805 (2012 Metric)", Packaging=TapeAndReel, Part Number=VJ0805V104ZXJCW1BC, Part Status=Active, PartId=3674, Price=0.04, Series=VJ, Size / Dimension="0.079\" L x 0.049\" W (2.00mm x 1.25mm)", Supplier 1=DigiKey, Thickness (Max)="0.028\" (0.70mm)"
C19 C20 C25 C26 C27 C28 C29 C30 C35 C36: library part CC0805MRX7R9BB104, "CAP CER 0.1UF 50V X7R 0805", Device Package="0805 (2012 Metric)", Manufacturer=Yageo, Operating Temperature="-55°C ~ 125°C", Supplier Part Number 1=311-4351-1-ND, Temperature Coefficient=X7R, Tolerance=±20%, Voltage - Rated=50V, Applications="General Purpose", Capacitance=0.1µF, ComponentLink1Description=Datasheet, ComponentLink1URL=https://www.yageo.com/upload/media/product/productsearch/datasheet/mlcc/UPY-GPHC_X7R_6.3V-to-50V_18.pdf, ComponentLink2Description="DigiKey Link", ComponentLink2URL=http://digikey.com/product-detail/en/yageo/CC0805MRX7R9BB104/311-4351-1-ND/8025440, LastUpdated="9/2/2020 1:04:42 AM", Lifecycle Status=Active, Minimum Order=1, Mounting Type="Surface Mount, MLCC", Package / Case="0805 (2012 Metric)", Packaging=TapeAndReel, Part Number=CC0805MRX7R9BB104, Part Status=Active, PartId=2475, Price=0.02, Series=CC, Size / Dimension="0.079\" L x 0.049\" W (2.00mm x 1.25mm)", Supplier 1=DigiKey, Thickness (Max)="0.037\" (0.95mm)"
C21: library part C2012JB1E106M125AB, "CAP CER 10UF 25V JB 0805", Device Package="0805 (2012 Metric)", Manufacturer="TDK Corporation", Operating Temperature="-25°C ~ 85°C", Supplier Part Number 1=445-11465-1-ND, Temperature Coefficient=JB, Tolerance=±20%, Voltage - Rated=25V, Applications="General Purpose", Capacitance=10µF, ComponentLink1Description=Datasheet, ComponentLink1URL=https://product.tdk.com/info/en/catalog/datasheets/mlcc_commercial_general_en.pdf?ref_disty=digikey, ComponentLink2Description="DigiKey Link", ComponentLink2URL=http://digikey.com/product-detail/en/tdk-corporation/C2012JB1E106M125AB/445-11465-1-ND/3953131, Features="Low ESL", LastUpdated="02.09.2020 1:04:40", Lifecycle Status=Active, Minimum Order=1, Mounting Type="Surface Mount, MLCC", Package / Case="0805 (2012 Metric)", Packaging=TapeAndReel, Part Number=C2012JB1E106M125AB, Part Status=Active, PartId=3479, Price=0.16, Series=C, Size / Dimension="0.079\" L x 0.049\" W (2.00mm x 1.25mm)", Supplier 1=DigiKey, Thickness (Max)="0.057\" (1.45mm)"
C22: library part T495B226K010ATE500, "CAP TANT 22UF 10% 10V 1411", Device Package="1411 (3528 Metric)", ESR (Equivalent Series Resistance)="500mOhm @ 100kHz", Lifetime @ Temp.="2000 Hrs @ 125°C", Manufacturer=KEMET, Manufacturer Size Code=B, Operating Temperature="-55°C ~ 125°C", Supplier Part Number 1=399-18339-1-ND, Tolerance=±10%, Voltage - Rated=10V, Capacitance=22µF, ComponentLink1Description=Datasheet, ComponentLink1URL=https://api.kemet.com/component-edge/download/datasheet/T495B226K010ATE500.pdf, ComponentLink2Description="DigiKey Link", ComponentLink2URL=http://digikey.com/product-detail/en/kemet/T495B226K010ATE500/399-18339-1-ND/9460195, Features="General Purpose", Height - Seated (Max)="0.083\" (2.10mm)", LastUpdated="02.09.2020 1:15:46", Lifecycle Status=Active, Minimum Order=1, Mounting Type="Surface Mount", Package / Case="1411 (3528 Metric)", Packaging=TapeAndReel, Part Number=T495B226K010ATE500, Part Status=Active, PartId=6, Price=0.46, Series=T495, Size / Dimension="0.138\" L x 0.110\" W (3.50mm x 2.80mm)", Supplier 1=DigiKey, Type=Molded
C23 C24: library part T494A225K010AT, "CAP TANT 2.2UF 10% 10V 1206", Device Package="1206 (3216 Metric)", ESR (Equivalent Series Resistance)=6Ohm, Lifetime @ Temp.="2000 Hrs @ 125°C", Manufacturer=KEMET, Manufacturer Size Code=A, Operating Temperature="-55°C ~ 125°C", Supplier Part Number 1=399-3826-1-ND, Tolerance=±10%, Voltage - Rated=10V, Capacitance=2.2µF, ComponentLink1Description=Datasheet, ComponentLink1URL=https://api.kemet.com/component-edge/download/datasheet/T494A225K010AT.pdf, ComponentLink2Description="DigiKey Link", ComponentLink2URL=http://digikey.com/product-detail/en/kemet/T494A225K010AT/399-3826-1-ND/819151, Features="General Purpose", Height - Seated (Max)="0.071\" (1.80mm)", LastUpdated="02.09.2020 1:15:55", Lifecycle Status=Active, Minimum Order=1, Mounting Type="Surface Mount", Package / Case="1206 (3216 Metric)", Packaging=TapeAndReel, Part Number=T494A225K010AT, Part Status=Active, PartId=1334, Price=0.20, Series=T494, Size / Dimension="0.126\" L x 0.063\" W (3.20mm x 1.60mm)", Supplier 1=DigiKey, Type=Molded
C31 C32: library part C0805C225K9RACTU, "CAP CER 2.2UF 6.3V X7R 0805", Device Package="0805 (2012 Metric)", Manufacturer=KEMET, Operating Temperature="-55°C ~ 125°C", Supplier Part Number 1=399-4936-1-ND, Temperature Coefficient=X7R, Tolerance=±10%, Voltage - Rated=6.3V, Applications="Bypass, Decoupling", Capacitance=2.2µF, ComponentLink1Description=Datasheet, ComponentLink1URL=https://api.kemet.com/component-edge/download/datasheet/C0805C225K9RACTU.pdf, ComponentLink2Description="DigiKey Link", ComponentLink2URL=http://digikey.com/product-detail/en/kemet/C0805C225K9RACTU/399-4936-1-ND/1090931, LastUpdated="9/2/2020 1:04:41 AM", Lifecycle Status=Active, Minimum Order=1, Mounting Type="Surface Mount, MLCC", Package / Case="0805 (2012 Metric)", Packaging=TapeAndReel, Part Number=C0805C225K9RACTU, Part Status=Active, PartId=2800, Price=0.08, Series="SMD Comm X7R", Size / Dimension="0.079\" L x 0.049\" W (2.00mm x 1.25mm)", Supplier 1=DigiKey, Thickness (Max)="0.055\" (1.40mm)"
C33 C34: library part GRM21BR61A476ME15L, "CAP CER 47UF 10V X5R 0805", Device Package="0805 (2012 Metric)", Manufacturer="Murata Electronics", Operating Temperature="-55°C ~ 85°C", Supplier Part Number 1=490-9961-1-ND, Temperature Coefficient=X5R, Tolerance=±20%, Voltage - Rated=10V, Applications="General Purpose", Capacitance=47µF, ComponentLink1Description=Datasheet, ComponentLink1URL=https://search.murata.co.jp/Ceramy/image/img/A01X/G101/ENG/GRM21BR61A476ME15-01.pdf, ComponentLink2Description="DigiKey Link", ComponentLink2URL=http://digikey.com/product-detail/en/murata-electronics/GRM21BR61A476ME15L/490-9961-1-ND/5026442, LastUpdated="02.09.2020 1:04:38", Lifecycle Status=Active, Minimum Order=1, Mounting Type="Surface Mount, MLCC", Package / Case="0805 (2012 Metric)", Packaging=TapeAndReel, Part Number=GRM21BR61A476ME15L, Part Status=Active, PartId=4627, Price=0.19, Series=GRM, Size / Dimension="0.079\" L x 0.049\" W (2.00mm x 1.25mm)", Supplier 1=DigiKey, Thickness (Max)="0.057\" (1.45mm)"
CR1 CR2 CR3 L1 U1 U4: "No Description Available", Copyright="Copyright (C) 2018 Accelerated Designs. All rights reserved"
  CR1 CR2: Built_By=EMA_UL_Team, Manufacturer_Part_Number=LMV321ILT, RefDes=RefDes, SourceLibrary=Update_to_database_2020-12-04, Type=DEV, Vendor=STMicroelectronics
  CR3: Built_By=EMA_UL_Team, Manufacturer_Part_Number=L298N, RefDes=RefDes, SourceLibrary=Updates_to_database_2020-11-02, Type=DEV, Vendor=STMicroelectronics
  L1: Built_By=EMA_UL_Team, Manufacturer_Part_Number=SPM6530T-2R2M, SourceLibrary=TDK_2015_05_22, Vendor=TDK
  U1: Built_By=EMA_UL_Team, Manufacturer_Part_Number=STM32F405RGT6, RefDes=RefDes, SourceLibrary=Updates_to_database_2020-10-19, Type=DEV, Vendor=STMicroelectronics
  U4: Built_By=EMA_Jessica, Manufacturer_Part_Number=MIC5219-3.3YM5-TR, RefDes=RefDes, SourceLibrary=Microchip_2019-08-23_3, Type=DEV, Vendor=Microchip
D1 D2 D3 D4 D5 D6 D7 D8: "DIODE GEN PURP 400V 1A DO214AC", Capacitance @ Vr, F="15pF @ 4V, 1MHz", Current - Average Rectified (Io)=1A, Current - Reverse Leakage @ Vr="5µA @ 400V", Manufacturer="Taiwan Semiconductor Corporation", Operating Temperature - Junction="-55°C ~ 150°C", Package / Case="DO-214AC, SMA", Supplier Device Package="DO-214AC (SMA)", Supplier Part Number 1=US1GR3GCT-ND, Voltage - DC Reverse (Vr) (Max)=400V, Voltage - Forward (Vf) (Max) @ If="1V @ 1A", ComponentLink1Description=Datasheet, ComponentLink1URL=https://www.taiwansemi.com/products/datasheet/US1A%20SERIES_M15.pdf, ComponentLink2Description="DigiKey Link", ComponentLink2URL=http://digikey.com/product-detail/en/taiwan-semiconductor-corporation/US1G-R3G/US1GR3GCT-ND/7360843, Diode Type=Standard, LastUpdated="9/2/2020 1:19:02 AM", Lifecycle Status=Active, Minimum Order=1, Mounting Type="Surface Mount", Packaging=TapeAndReel, Part Number="US1G R3G", Part Status=Active, PartId=930, Price=0.09, Reverse Recovery Time (trr)=50ns, Series=-, Speed="Fast Recovery =< 500ns, > 200mA (Io)", Supplier 1=DigiKey
IMU: "CONN HEADER VERT 5POS 2.54MM", Insulation Color=Natural, Manufacturer=Molex, Material Flammability Rating="UL94 V-0", Supplier Part Number 1=WM4114-ND, ComponentLink1Description=Datasheet, ComponentLink1URL=https://www.molex.com/pdm_docs/sd/022272051_sd.pdf, ComponentLink2Description="DigiKey Link", ComponentLink2URL=http://digikey.com/product-detail/en/molex/0022272051/WM4114-ND/1130580, Connector Type=Header, Contact Finish - Mating=Tin, Contact Finish - Post=Tin, Contact Finish Thickness - Mating="100.0µin (2.54µm)", Contact Length - Mating="0.295\" (7.49mm)", Contact Length - Post="0.140\" (3.56mm)", Contact Material=Brass, Contact Shape=Square, Contact Type="Male Pin", Fastening Type="Friction Lock", Insulation Height="0.461\" (11.70mm)", Insulation Material="Polyamide (PA), Nylon", LastUpdated="1/12/2020 11:52:16 PM", Lifecycle Status=Active, Minimum Order=1, Mounting Type="Through Hole", Number of Positions=5, Number of Positions Loaded=All, Number of Rows=1, Overall Contact Length="0.560\" (14.22mm)", Packaging=Bulk, Part Number=0022272051, Part Status=Active, PartId=79, Pitch - Mating="0.100\" (2.54mm)", Price=0.46, Series="KK 6410", Shrouding="Shrouded - 1 Wall", Style="Board to Cable/Wire", Supplier 1=DigiKey, Termination=Solder
J1: "CONN HEADER SMD 10POS 1.27MM", Current Rating (Amps)=1A, Manufacturer="CNC Tech", Material Flammability Rating="UL94 V-0", Operating Temperature="-40°C ~ 105°C", Supplier Part Number 1=1175-1735-ND, ComponentLink1Description=Datasheet, ComponentLink1URL=http://cnctech.us/idcmatching2.pdf, ComponentLink2Description="DigiKey Link", ComponentLink2URL=http://digikey.com/product-detail/en/cnc-tech/3221-10-0300-00/1175-1735-ND/4878946, Connector Type=Header, Contact Finish - Mating=Gold, Contact Finish - Post=Gold, Contact Finish Thickness - Mating=Flash, Contact Material=Brass, Contact Shape=Square, Contact Type="Male Pin", Fastening Type=Push-Pull, Features="Keying Slot", Insulation Height="0.213\" (5.40mm)", Insulation Material="Polyamide (PA6T), Nylon 6T", LastUpdated="1/13/2020 12:09:21 AM", Lifecycle Status=Active, Minimum Order=1, Mounting Type="Surface Mount", Number of Positions=10, Number of Positions Loaded=All, Number of Rows=2, Packaging=Tray, Part Number=3221-10-0300-00, Part Status=Active, PartId=109, Pitch - Mating="0.050\" (1.27mm)", Price=0.73, Row Spacing - Mating="0.050\" (1.27mm)", Series=-, Shrouding="Shrouded - 4 Wall", Style="Board to Cable/Wire", Supplier 1=DigiKey, Termination=Solder
L2: library part 74479776233, "FIXED IND 3.3UH 1.1A 130 MOHM", Current - Saturation=300mA, Current Rating (Amps)=1.1A, DC Resistance (DCR)=130mOhm, Device Package="0806 (2016 Metric)", Frequency - Self Resonant=60MHz, Inductance Frequency - Test=1MHz, Manufacturer="Würth Elektronik", Operating Temperature="-40°C ~ 125°C", Q @ Freq="10 @ 1MHz", Supplier Part Number 1=732-2955-1-ND, Tolerance=±20%, ComponentLink1Description=Datasheet, ComponentLink1URL=https://katalog.we-online.de/pbs/datasheet/74479776233.pdf, ComponentLink2Description="DigiKey Link", ComponentLink2URL=http://digikey.com/product-detail/en/w-rth-elektronik/74479776233/732-2955-1-ND/2524827, Height - Seated (Max)="0.039\" (1.00mm)", Inductance=3.3µH, LastUpdated="02.09.2020 1:24:34", Lifecycle Status=Active, Material - Core="0806 (2016 Metric)", Minimum Order=1, Mounting Type="Surface Mount", Package / Case="0806 (2016 Metric)", Packaging=TapeAndReel, Part Number=74479776233, Part Status=Active, PartId=3067, Price=0.54, Series=WE-PMI, Shielding=Shielded, Size / Dimension="0.079\" L x 0.063\" W (2.00mm x 1.60mm)", Supplier 1=DigiKey, Supplier Device Package="0806 (2016 Metric)", Type=Multilayer
M1 M2: "CONN HEADER VERT 6POS 2.54MM", Insulation Color=Natural, Manufacturer=Molex, Material Flammability Rating="UL94 V-0", Supplier Part Number 1=WM4115-ND, ComponentLink1Description=Datasheet, ComponentLink1URL=https://www.molex.com/pdm_docs/sd/022272061_sd.pdf, ComponentLink2Description="DigiKey Link", ComponentLink2URL=http://digikey.com/product-detail/en/molex/0022272061/WM4115-ND/1130581, Connector Type=Header, Contact Finish - Mating=Tin, Contact Finish - Post=Tin, Contact Finish Thickness - Mating="100.0µin (2.54µm)", Contact Length - Mating="0.295\" (7.49mm)", Contact Length - Post="0.140\" (3.56mm)", Contact Material=Brass, Contact Shape=Square, Contact Type="Male Pin", Fastening Type="Friction Lock", Insulation Height="0.461\" (11.70mm)", Insulation Material="Polyamide (PA), Nylon", LastUpdated="1/12/2020 11:52:24 PM", Lifecycle Status=Active, Minimum Order=1, Mounting Type="Through Hole", Number of Positions=6, Number of Positions Loaded=All, Number of Rows=1, Overall Contact Length="0.560\" (14.22mm)", Packaging=Bulk, Part Number=0022272061, Part Status=Active, PartId=80, Pitch - Mating="0.100\" (2.54mm)", Price=0.49, Series="KK 6410", Shrouding="Shrouded - 1 Wall", Style="Board to Cable/Wire", Supplier 1=DigiKey, Termination=Solder
R1: library part RMCS0805JT10K0, "RES 10K OHM 5% 1/8W 0805", Device Package="0805 (2012 Metric)", Manufacturer="Stackpole Electronics Inc", Operating Temperature="-55°C ~ 155°C", Power (Watts)="0.125W, 1/8W", Supplier Device Package=0805, Supplier Part Number 1=RMCS0805JT10K0CT-ND, Temperature Coefficient=±100ppm/°C, Tolerance=±5%, ComponentLink1Description=Datasheet, ComponentLink1URL=https://www.seielect.com/catalog/sei-rmcs.pdf, ComponentLink2Description="DigiKey Link", ComponentLink2URL=http://digikey.com/product-detail/en/stackpole-electronics-inc/RMCS0805JT10K0/RMCS0805JT10K0CT-ND/9770325, Composition="Thick Film", Features=Anti-Sulfur, Height - Seated (Max)="0.024\" (0.60mm)", LastUpdated="9/2/2020 1:14:40 AM", Lifecycle Status=Active, Minimum Order=1, Number of Terminations=2, Package / Case="0805 (2012 Metric)", Packaging=TapeAndReel, Part Number=RMCS0805JT10K0, Part Status=Active, PartId=46907, Price=0.01, Resistance="10 kOhms", Series=RMCS, Size / Dimension="0.079\" L x 0.049\" W (2.00mm x 1.25mm)", Supplier 1=DigiKey
R2: library part RC0805JR-0710KL, "RES SMD 10K OHM 5% 1/8W 0805", Device Package="0805 (2012 Metric)", Manufacturer=Yageo, Operating Temperature="-55°C ~ 155°C", Power (Watts)="0.125W, 1/8W", Supplier Device Package=0805, Supplier Part Number 1=311-10KARCT-ND, Temperature Coefficient=±100ppm/°C, Tolerance=±5%, ComponentLink1Description=Datasheet, ComponentLink1URL=https://www.yageo.com/upload/media/product/productsearch/datasheet/rchip/PYu-RC_Group_51_RoHS_L_10.pdf, ComponentLink2Description="DigiKey Link", ComponentLink2URL=http://digikey.com/product-detail/en/yageo/RC0805JR-0710KL/311-10KARCT-ND/731188, Composition="Thick Film", Features="Moisture Resistant", Height - Seated (Max)="0.024\" (0.60mm)", LastUpdated="9/2/2020 1:15:00 AM", Lifecycle Status=Active, Minimum Order=1, Number of Terminations=2, Package / Case="0805 (2012 Metric)", Packaging=CutTape, Part Number=RC0805JR-0710KL, Part Status=Active, PartId=38737, Price=0.10, Resistance="10 kOhms", Series=RC, Size / Dimension="0.079\" L x 0.049\" W (2.00mm x 1.25mm)", Supplier 1=DigiKey
R3 R4: library part CRCW08054K70JNTA, "RES SMD 4.7K OHM 5% 1/8W 0805", Device Package="0805 (2012 Metric)", Manufacturer="Vishay Dale", Operating Temperature="-55°C ~ 155°C", Power (Watts)="0.125W, 1/8W", Ratings=AEC-Q200, Supplier Device Package=0805, Supplier Part Number 1=541-3029-1-ND, Temperature Coefficient=±200ppm/°C, Tolerance=±5%, ComponentLink1Description=Datasheet, ComponentLink1URL=http://www.vishay.com/docs/20008/dcrcw.pdf, ComponentLink2Description="DigiKey Link", ComponentLink2URL=http://digikey.com/product-detail/en/vishay-dale/CRCW08054K70JNTA/541-3029-1-ND/6073672, Composition="Thick Film", Features="Automotive AEC-Q200", Height - Seated (Max)="0.020\" (0.50mm)", LastUpdated="9/2/2020 1:15:17 AM", Lifecycle Status=Active, Minimum Order=1, Number of Terminations=2, Package / Case="0805 (2012 Metric)", Packaging=TapeAndReel, Part Number=CRCW08054K70JNTA, Part Status=Active, PartId=30842, Price=0.01, Resistance="4.7 kOhms", Series=CRCW, Size / Dimension="0.079\" L x 0.049\" W (2.00mm x 1.25mm)", Supplier 1=DigiKey
R5: library part RC0805FR-07365KL, "RES SMD 365K OHM 1% 1/8W 0805", Device Package="0805 (2012 Metric)", Manufacturer=Yageo, Operating Temperature="-55°C ~ 155°C", Power (Watts)="0.125W, 1/8W", Resistance="365 kOhms", Supplier Device Package=0805, Supplier Part Number 1=311-365KCRCT-ND, Temperature Coefficient=±100ppm/°C, Tolerance=±1%, ComponentLink1Description=Datasheet, ComponentLink1URL=https://www.yageo.com/upload/media/product/productsearch/datasheet/rchip/PYu-RC_Group_51_RoHS_L_10.pdf, ComponentLink2Description="DigiKey Link", ComponentLink2URL=http://digikey.com/product-detail/en/yageo/RC0805FR-07365KL/311-365KCRCT-ND/730836, Composition="Thick Film", Features="Moisture Resistant", Height - Seated (Max)="0.024\" (0.60mm)", LastUpdated="9/2/2020 1:14:46 AM", Lifecycle Status=Active, Minimum Order=1, Number of Terminations=2, Package / Case="0805 (2012 Metric)", Packaging=CutTape, Part Number=RC0805FR-07365KL, Part Status=Active, PartId=45039, Price=0.10, Series=RC, Size / Dimension="0.079\" L x 0.049\" W (2.00mm x 1.25mm)", Supplier 1=DigiKey
R6: library part KTR10EZPF4422, "RES SMD 44.2K OHM 1% 1/8W 0805", Device Package="0805 (2012 Metric)", Manufacturer="Rohm Semiconductor", Operating Temperature="-55°C ~ 155°C", Power (Watts)="0.125W, 1/8W", Ratings=AEC-Q200, Resistance="44.2 kOhms", Supplier Device Package=0805, Supplier Part Number 1=RHM44.2KAHCT-ND, Temperature Coefficient=±100ppm/°C, Tolerance=±1%, ComponentLink1Description=Datasheet, ComponentLink1URL=https://www.rohm.com/datasheet/KTR03EZPF/ktr-e, ComponentLink2Description="DigiKey Link", ComponentLink2URL=http://digikey.com/product-detail/en/rohm-semiconductor/KTR10EZPF4422/RHM44.2KAHCT-ND/4054582, Composition="Thick Film", Features="Automotive AEC-Q200, High Voltage", Height - Seated (Max)="0.026\" (0.65mm)", LastUpdated="9/2/2020 1:15:21 AM", Lifecycle Status=Active, Minimum Order=1, Number of Terminations=2, Package / Case="0805 (2012 Metric)", Packaging=TapeAndReel, Part Number=KTR10EZPF4422, Part Status=Active, PartId=29064, Price=0.02, Series=KTR, Size / Dimension="0.079\" L x 0.049\" W (2.00mm x 1.25mm)", Supplier 1=DigiKey
R7: library part RMCF0805FT825R, "RES 825 OHM 1% 1/8W 0805", Device Package="0805 (2012 Metric)", Manufacturer="Stackpole Electronics Inc", Operating Temperature="-55°C ~ 155°C", Power (Watts)="0.125W, 1/8W", Ratings=AEC-Q200, Resistance="825 Ohms", Supplier Device Package=0805, Supplier Part Number 1=RMCF0805FT825RCT-ND, Temperature Coefficient=±100ppm/°C, Tolerance=±1%, ComponentLink1Description=Datasheet, ComponentLink1URL=https://www.seielect.com/catalog/sei-rmcf_rmcp.pdf, ComponentLink2Description="DigiKey Link", ComponentLink2URL=http://digikey.com/product-detail/en/stackpole-electronics-inc/RMCF0805FT825R/RMCF0805FT825RCT-ND/1942368, Composition="Thick Film", Features="Automotive AEC-Q200", Height - Seated (Max)="0.026\" (0.65mm)", LastUpdated="9/2/2020 1:14:59 AM", Lifecycle Status=Active, Minimum Order=1, Number of Terminations=2, Package / Case="0805 (2012 Metric)", Packaging=CutTape, Part Number=RMCF0805FT825R, Part Status=Active, PartId=38939, Price=0.10, Series=RMCF, Size / Dimension="0.079\" L x 0.049\" W (2.00mm x 1.25mm)", Supplier 1=DigiKey
R8: library part RC0603FR-07105KL, "RES SMD 105K OHM 1% 1/10W 0603", Device Package="0603 (1608 Metric)", Manufacturer=Yageo, Operating Temperature="-55°C ~ 155°C", Power (Watts)="0.1W, 1/10W", Supplier Device Package=0603, Supplier Part Number 1=311-105KHRCT-ND, Temperature Coefficient=±100ppm/°C, Tolerance=±1%, ComponentLink1Description=Datasheet, ComponentLink1URL=https://www.yageo.com/upload/media/product/productsearch/datasheet/rchip/PYu-RC_Group_51_RoHS_L_10.pdf, ComponentLink2Description="DigiKey Link", ComponentLink2URL=http://digikey.com/product-detail/en/yageo/RC0603FR-07105KL/311-105KHRCT-ND/729840, Composition="Thick Film", Features="Moisture Resistant", Height - Seated (Max)="0.022\" (0.55mm)", LastUpdated="9/2/2020 1:10:19 AM", Lifecycle Status=Active, Minimum Order=1, Number of Terminations=2, Package / Case="0603 (1608 Metric)", Packaging=CutTape, Part Number=RC0603FR-07105KL, Part Status=Active, PartId=7511, Price=0.10, Resistance="105 kOhms", Series=RC, Size / Dimension="0.063\" L x 0.031\" W (1.60mm x 0.80mm)", Supplier 1=DigiKey
R9: library part CRCW080591K0JNEA, "RES SMD 91K OHM 5% 1/8W 0805", Device Package="0805 (2012 Metric)", Manufacturer="Vishay Dale", Operating Temperature="-55°C ~ 155°C", Power (Watts)="0.125W, 1/8W", Ratings=AEC-Q200, Resistance="91 kOhms", Supplier Device Package=0805, Supplier Part Number 1=541-91KACT-ND, Temperature Coefficient=±200ppm/°C, Tolerance=±5%, ComponentLink1Description=Datasheet, ComponentLink1URL=http://www.vishay.com/docs/20035/dcrcwe3.pdf, ComponentLink2Description="DigiKey Link", ComponentLink2URL=http://digikey.com/product-detail/en/vishay-dale/CRCW080591K0JNEA/541-91KACT-ND/1180387, Composition="Thick Film", Features="Automotive AEC-Q200", Height - Seated (Max)="0.020\" (0.50mm)", LastUpdated="9/2/2020 1:14:34 AM", Lifecycle Status=Active, Minimum Order=1, Number of Terminations=2, Package / Case="0805 (2012 Metric)", Packaging=CutTape, Part Number=CRCW080591K0JNEA, Part Status=Active, PartId=48020, Price=0.10, Series=CRCW, Size / Dimension="0.079\" L x 0.049\" W (2.00mm x 1.25mm)", Supplier 1=DigiKey
R10 R11: library part LVT12R0100FER, "RES 0.01 OHM 1% 1W 1206", Device Package="1206 (3216 Metric)", Manufacturer=Ohmite, Operating Temperature="-55°C ~ 155°C", Power (Watts)=1W, Supplier Device Package=1206, Supplier Part Number 1=LVT12R0100FERCT-ND, Temperature Coefficient=±75ppm/°C, Tolerance=±1%, ComponentLink1Description=Datasheet, ComponentLink1URL=https://www.ohmite.com/assets/docs/res_lvt.pdf?r=false, ComponentLink2Description="DigiKey Link", ComponentLink2URL=http://digikey.com/product-detail/en/ohmite/LVT12R0100FER/LVT12R0100FERCT-ND/9556182, Composition="Metal Element", Features="Current Sense", Height - Seated (Max)="0.026\" (0.65mm)", LastUpdated="9/2/2020 1:12:33 AM", Lifecycle Status=Active, Minimum Order=1, Number of Terminations=2, Package / Case="1206 (3216 Metric)", Packaging=TapeAndReel, Part Number=LVT12R0100FER, Part Status=Active, PartId=42343, Price=0.07, Resistance="10 mOhms", Series=LVT, Size / Dimension="0.126\" L x 0.063\" W (3.20mm x 1.60mm)", Supplier 1=DigiKey
R12 R13: library part RN73R2ATTD1001F50, "RES 1K OHM 1% 1/8W 0805", Device Package="0805 (2012 Metric)", Manufacturer="KOA Speer Electronics, Inc.", Operating Temperature="-55°C ~ 155°C", Power (Watts)="0.125W, 1/8W", Supplier Device Package=0805, Supplier Part Number 1=2019-RN73R2ATTD1001F50CT-ND, Temperature Coefficient=±50ppm/°C, Tolerance=±1%, ComponentLink1Description=Datasheet, ComponentLink1URL=//media.digikey.com/pdf/Data%20Sheets/KOA%20Speer/RN73R_Type_DS.pdf, ComponentLink2Description="DigiKey Link", ComponentLink2URL=http://digikey.com/product-detail/en/koa-speer-electronics-inc/RN73R2ATTD1001F50/2019-RN73R2ATTD1001F50CT-ND/11476952, Composition="Metal Film", Features="Moisture Resistant", LastUpdated="9/2/2020 1:14:23 AM", Lifecycle Status=Active, Minimum Order=1, Number of Terminations=2, Package / Case="0805 (2012 Metric)", Packaging=TapeAndReel, Part Number=RN73R2ATTD1001F50, Part Status=Active, PartId=50101, Price=0.06, Resistance="1 kOhms", Series=RN73R, Supplier 1=DigiKey